# Altium PCB ControlBoard_v3.PcbDoc (part 1 of 3)
Units mm, origin at the board's own origin, x right, y up, seen from the top; angles counter-clockwise.
Board outline 113.28 x 137.67 mm, 2 copper layers (Top Layer, Bottom Layer); 118 components, 107 nets, 631 pads, 214 vias.
Unrouted connection lines stored in the file: 3.
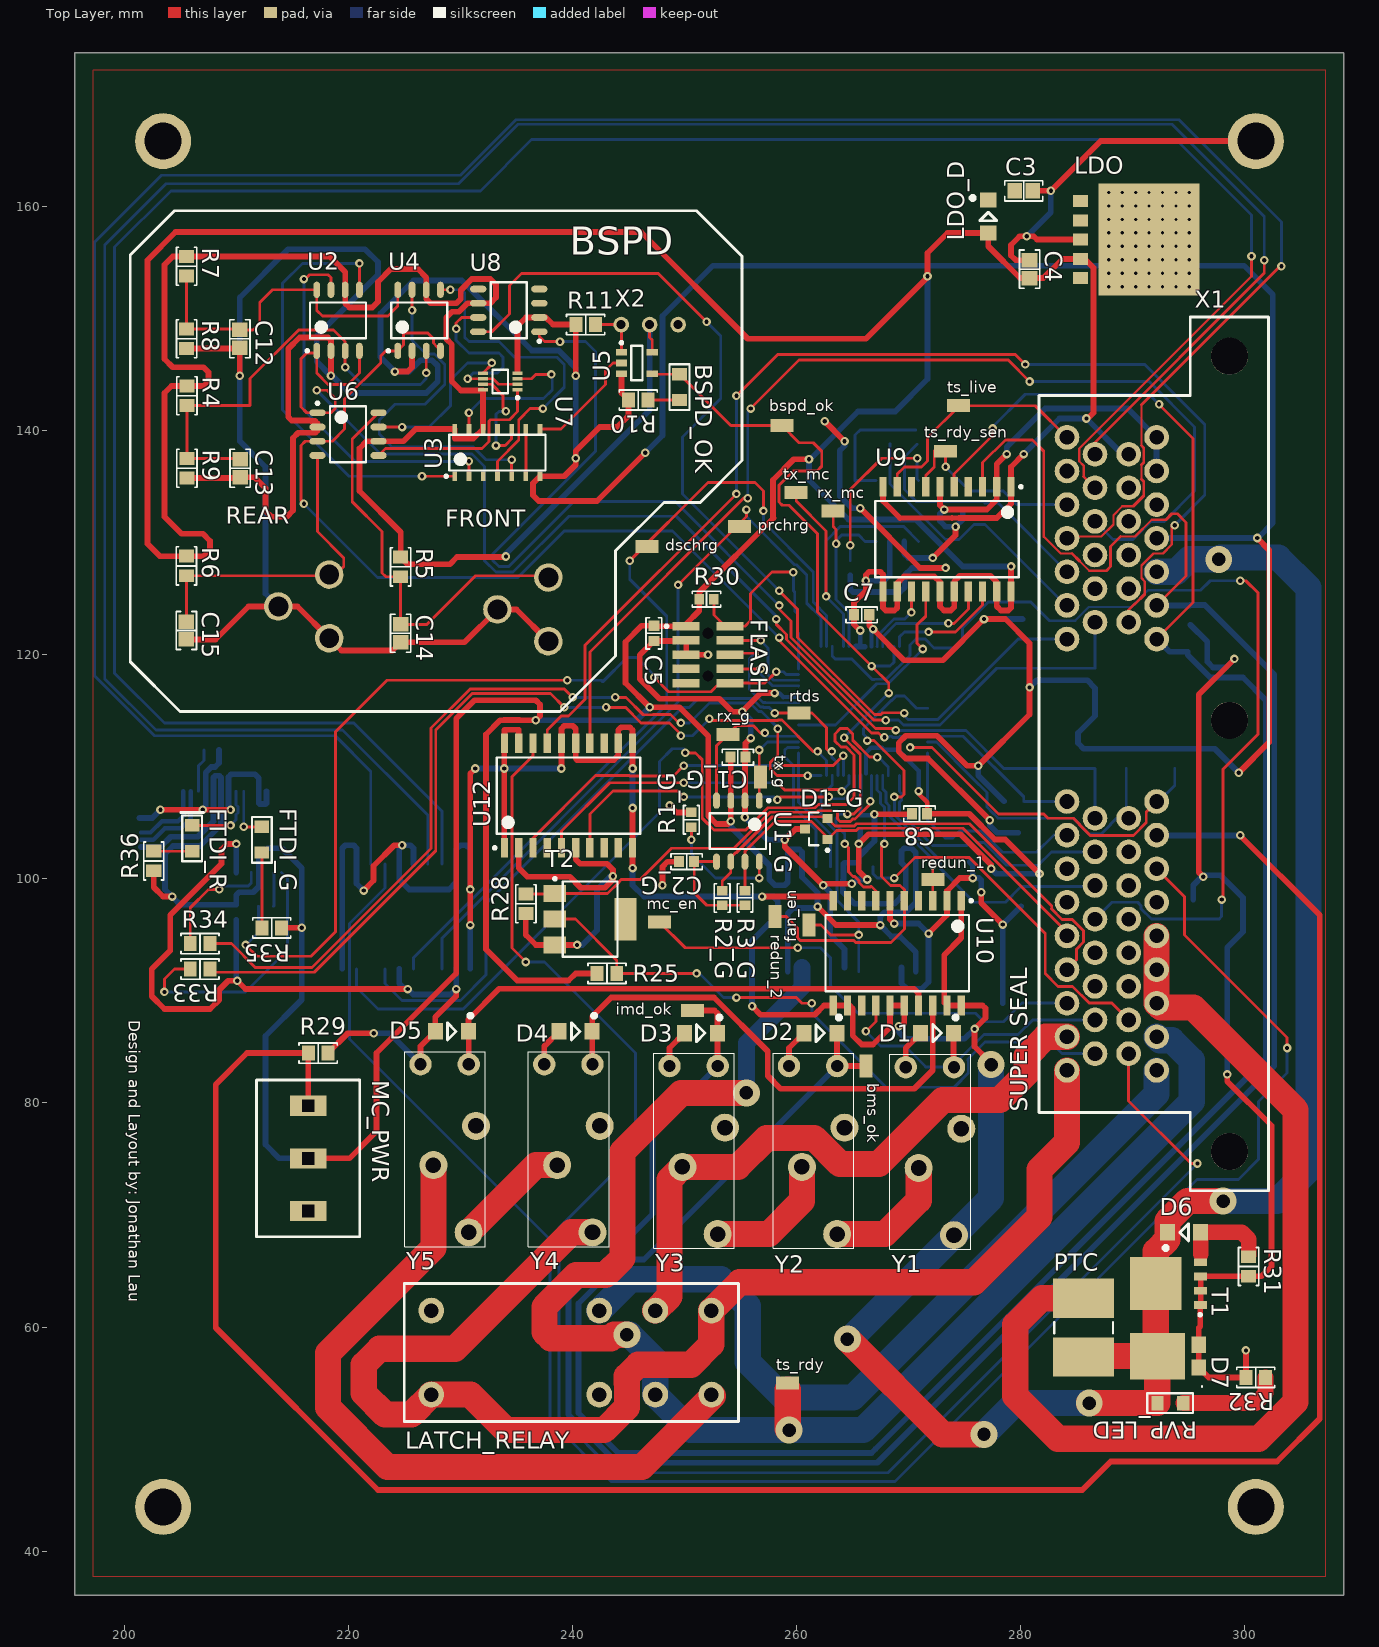
[diagram p0: Top Layer view]
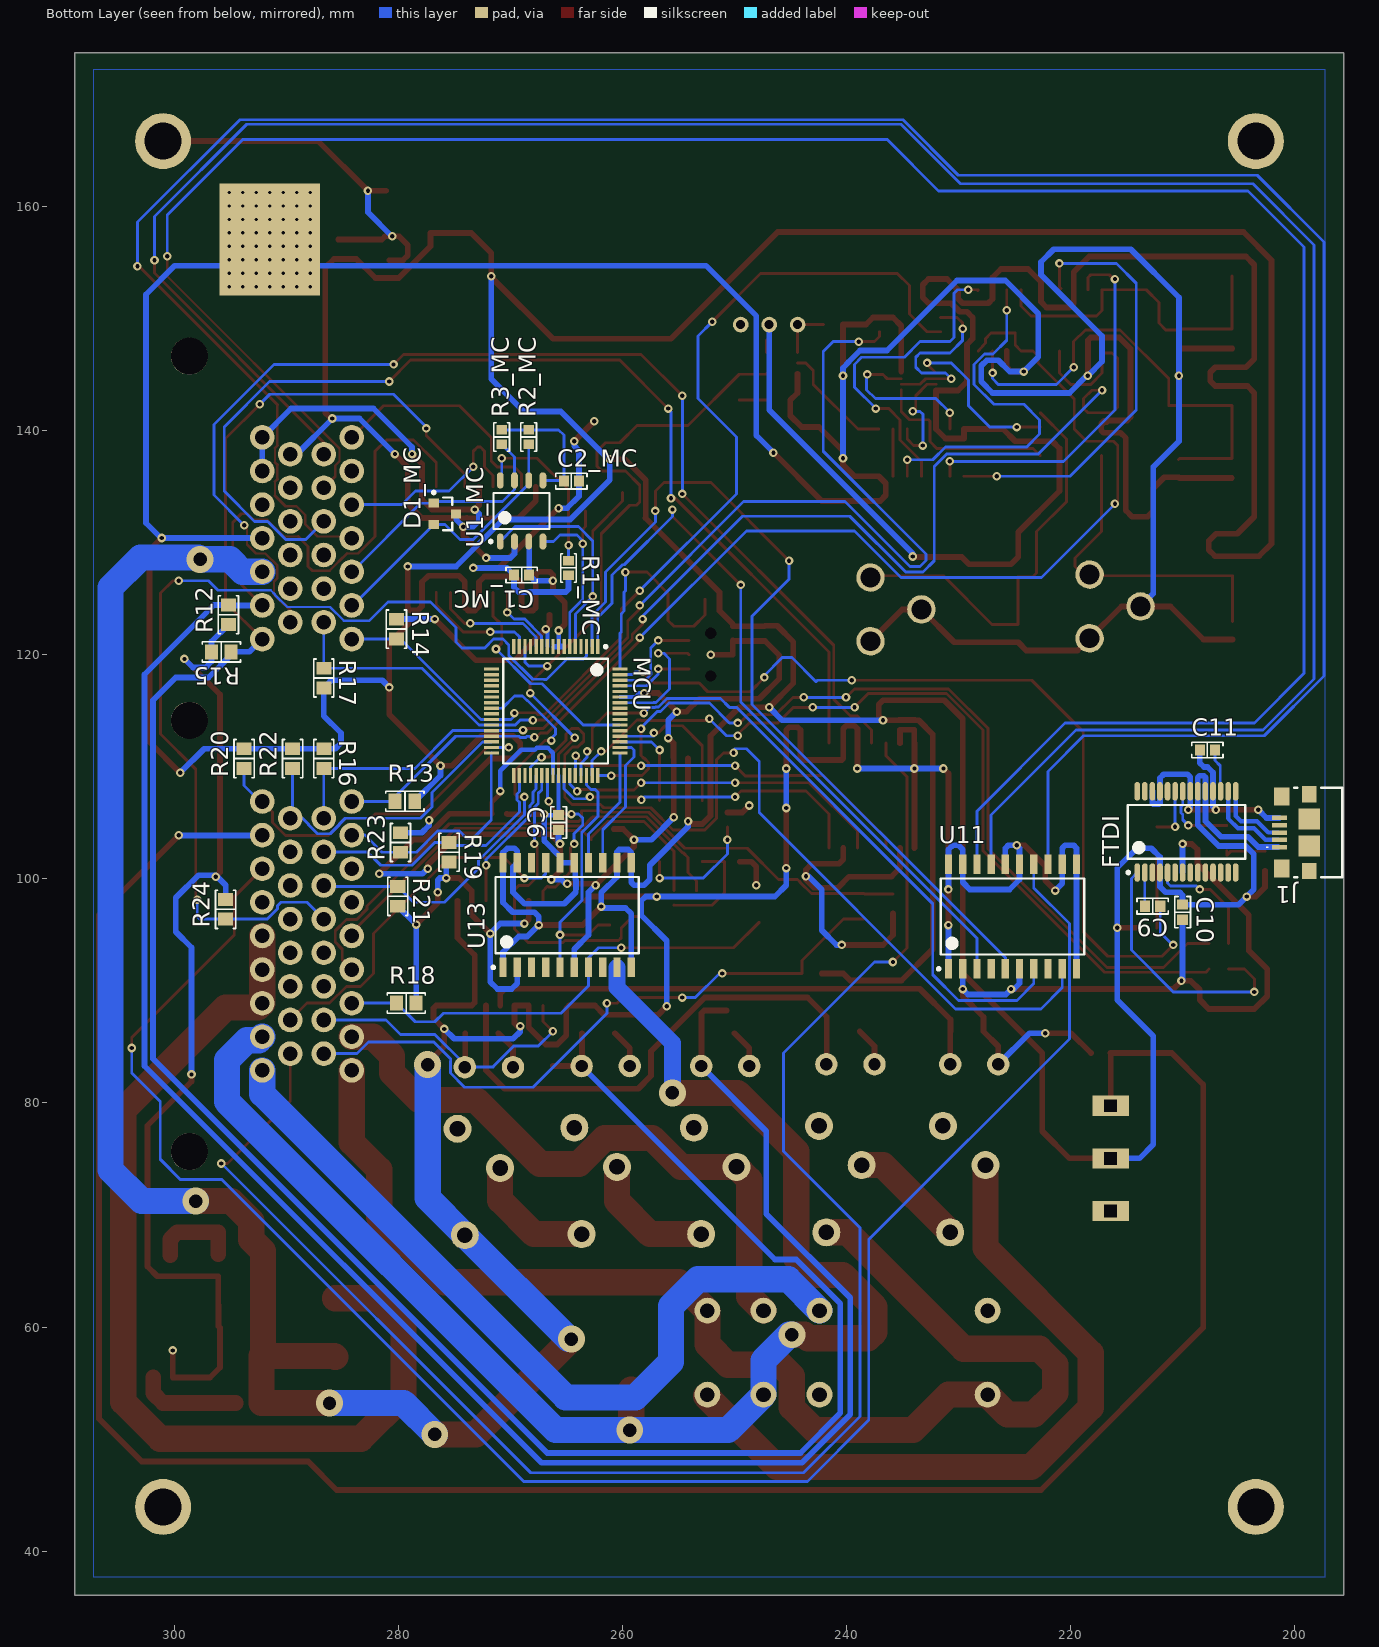
[diagram p1: Bottom Layer view, seen from below]
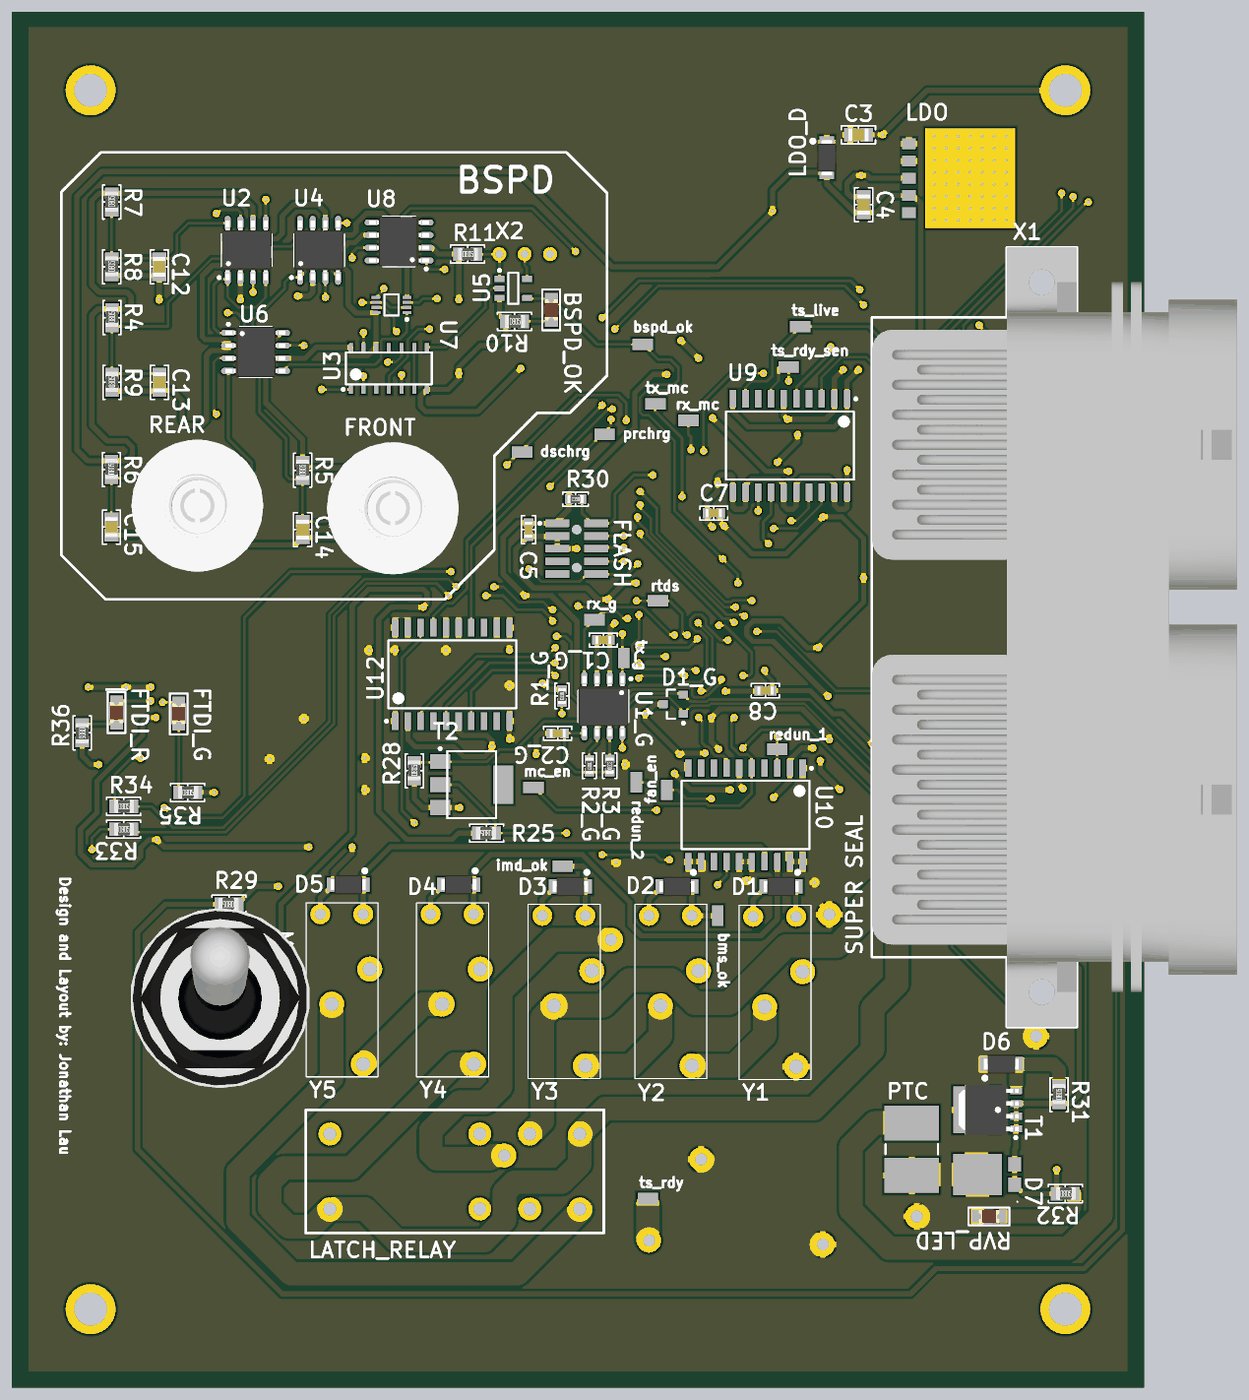
[diagram p3: 3D render of the assembled board from above, using the file's embedded part models]
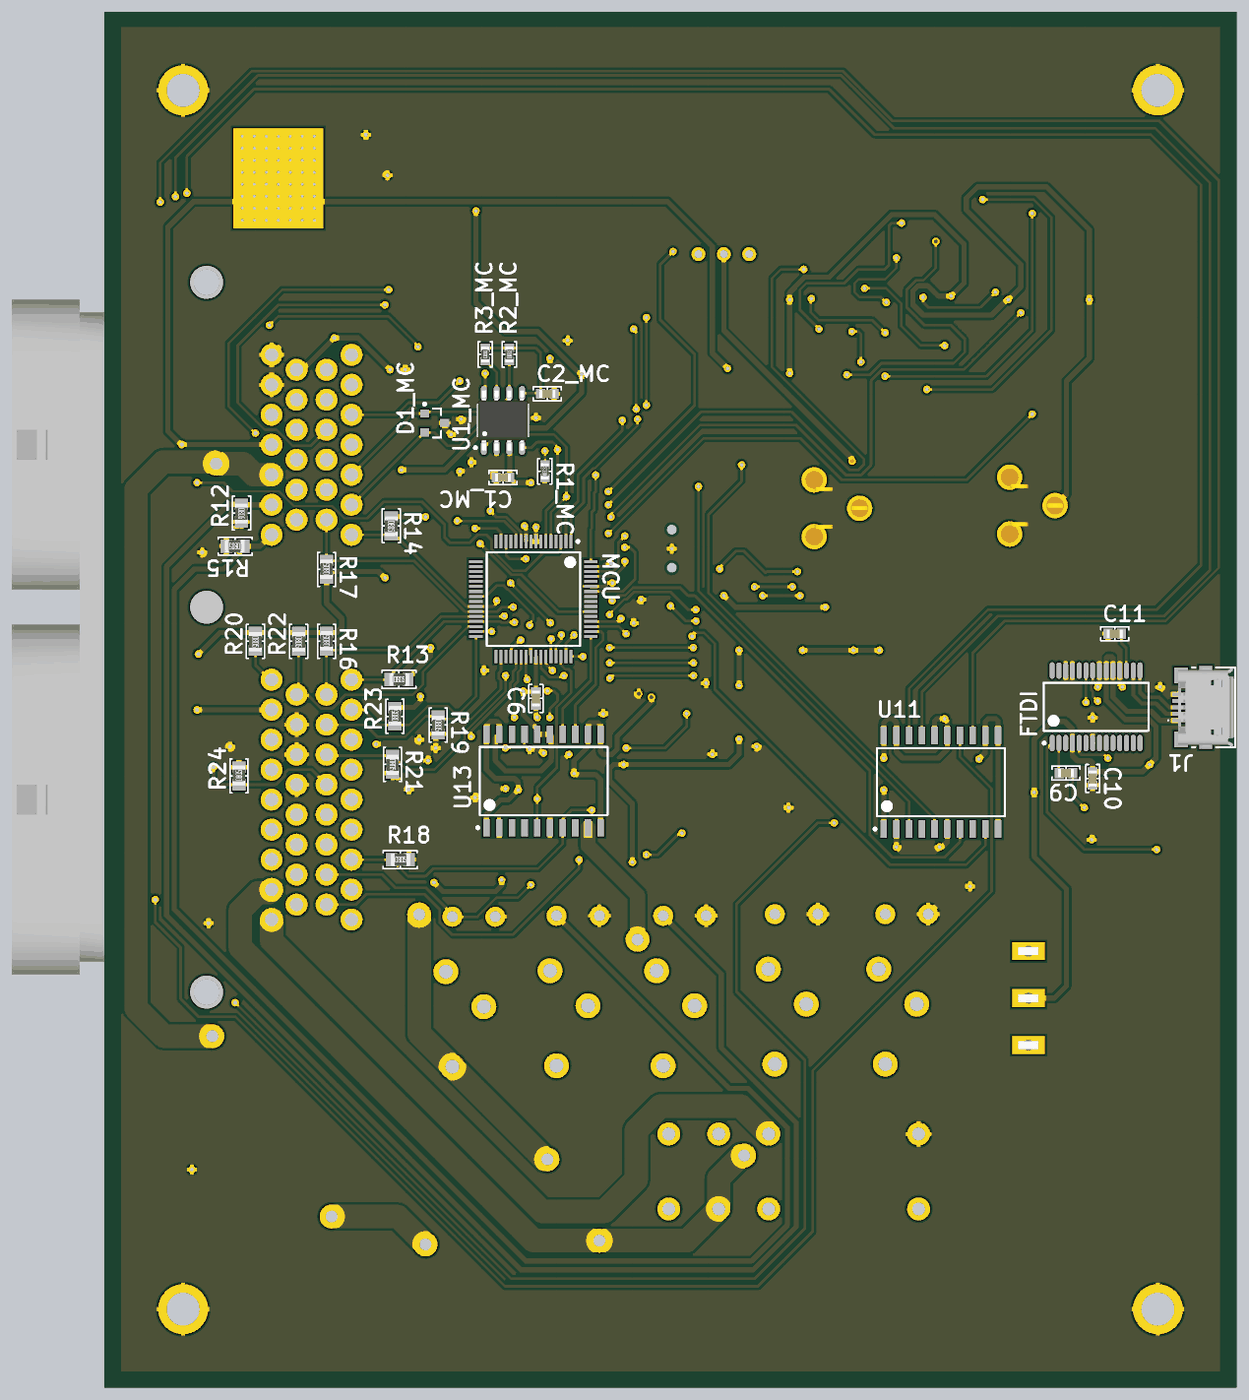
[diagram p4: 3D render of the assembled board from below, using the file's embedded part models]

## Layer stack, top to bottom
Top Solder: solder mask 0.0102, Solder Resist, Dk 3.5
Top Layer: signal copper 0.0356
Dielectric 1: dielectric 0.32, FR-4, Dk 4.8
Bottom Layer: signal copper 0.0356
Bottom Solder: solder mask 0.0102, Solder Resist, Dk 3.5

## Board outline
195.58,36.068 308.864,36.068 308.864,173.736 195.58,173.736

## Design rules (kind name [scope] priority, off if disabled: settings)
Clearance Clearance_3 [InNamedPolygon('GLV')] p1: gap=0.254 ignorepadtopadclearanceinfootprint=FALSE except(0: Arc-Hole Track-Hole SMDPad-Hole THPad-Hole Via-Hole Fill-Hole Poly-Hole Region-Hole Text-Hole)
Clearance Clearance_2 [InNamedPolygon('DGND')] p2: gap=0.254 ignorepadtopadclearanceinfootprint=FALSE except(0: Arc-Hole Track-Hole SMDPad-Hole THPad-Hole Via-Hole Fill-Hole Poly-Hole Region-Hole Text-Hole)
Clearance Clearance_1 [InNamedPolygon('GLV')] p3: gap=0.254 ignorepadtopadclearanceinfootprint=FALSE except(0: Arc-Hole Track-Hole SMDPad-Hole THPad-Hole Via-Hole Fill-Hole Poly-Hole Region-Hole Text-Hole)
Clearance [InNetClass('All Nets')] p4: gap=0.152 ignorepadtopadclearanceinfootprint=TRUE except(0.203: Poly-Hole)
DiffPairsRouting [All] p1: maxlimit=0.254 minlimit=0.254 mostfreqgap=0.254 toplayer_minwidth=0.381 toplayer_maxwidth=0.381 toplayer_prefwidth=0.381 bottomlayer_minwidth=0.381 bottomlayer_maxwidth=0.381 bottomlayer_prefwidth=0.381 maxuncoupledlength=12.7
FabricationTestPointUsage TestPointUsage [All] p1: valid=0 allowmultiple=FALSE
FabricationTestpoint Testpoint [All] p1: side=3 testpointundercomponent=TRUE minsize=1.016 maxsize=2.54 preferedsize=1.524 minholesize=0.508 maxholesize=1.016 preferedholesize=0.813 testpointgrid=0.025 allowsidetop=TRUE allowsidebottom=TRUE usegrid=TRUE gridtolerance=0
Height [All] p1: minheight=0 maxheight=50 prefheight=12.7
HoleSize [All] p1: absolutevalues=TRUE maxlimit=6.274 minlimit=0.254 maxpercent=80.000 minpercent=20.000
PasteMaskExpansion PasteMaskExpansion_1 [InComponent('P1')] p1: expansion=-3.81
PasteMaskExpansion [All] p2: expansion=0
PlaneClearance [All] p1: clearance=0.254
PlaneConnect [All] p1: planeconnectstyle=Relief reliefexpansion=0.381 reliefentries=4 reliefconductorwidth=0.254 reliefairgap=0.254
PolygonConnect PolygonConnect_4 [All vs IsNamedPolygon('GLV')] p1: connectstyle=Relief reliefconductorwidth=0.6 reliefentries=4 polygonreliefangle="90 Angle" airgapwidth=0.254
PolygonConnect PolygonConnect_3 [All vs IsNamedPolygon('GLV')] p2: connectstyle=Relief reliefconductorwidth=0.513 reliefentries=4 polygonreliefangle="90 Angle" airgapwidth=0.254
PolygonConnect PolygonConnect_2 [All vs IsNamedPolygon('GLV')] p3: connectstyle=Relief reliefconductorwidth=0.254 reliefentries=4 polygonreliefangle="90 Angle" airgapwidth=0.254
PolygonConnect PolygonConnect_1 [All vs IsNamedPolygon('DGND')] p4: connectstyle=Relief reliefconductorwidth=0.4 reliefentries=4 polygonreliefangle="90 Angle" airgapwidth=0.254
PolygonConnect [All] p5: connectstyle=Relief reliefconductorwidth=0.254 reliefentries=4 polygonreliefangle="90 Angle" airgapwidth=0.254
RoutingVias [All] p1: holewidth=0.381 width=0.762 viastyle="Through Hole" minholewidth=0.254 minwidth=0.508 maxholewidth=2 maxwidth=2.5
SilkToSolderMaskClearance SilkscreenOverComponentPads [IsPad] p1: minsilkscreentomaskgap=0.254 clearancetoexposedcopper=TRUE
SolderMaskExpansion [All] p1: expansion=0.127
UnRoutedNet [All] p1: checkbadconnections=TRUE
Width [All] p1: maxlimit=3.81 minlimit=0.203 preferedwidth=0.254 minimp=50.000000 maximp=50.000000 favimp=50.000000
20 further rules are at their usual default settings.

## Classes and differential pairs
channel class CAN_Tranceiver: GEN MC
component class USB: C9 C10 C11 FTDI FTDI_G FTDI_R J1 R33 R34 R35 R36
component class SHUTDOWN: D1 D2 D3 D4 D5 LATCH_RELAY Y1 Y2 Y3 Y4 Y5
component class RVP_OVP: D6 D7 PTC R31 R32 RVP_LED T1
component class MCU: C5 C6 C7 C8 FLASH MCU R30 rx_g rx_mc tx_g tx_mc
component class MC: C1_MC C2_MC D1_MC R1_MC R2_MC R3_MC U1_MC
component class MC_PWR_ENABLE: MC_PWR R29
component class LDO_5V: C3 C4 LDO LDO_D
component class GEN: C1_G C2_G D1_G R1_G R2_G R3_G U1_G
component class DRIVERS: bms_ok bspd_ok dschrg fan_en imd_ok mc_en prchrg R25 R28 redun_1 redun_2 rtds T2 ts_live ts_rdy ts_rdy_sen U9 U10 U11 U12 U13
component class CONNECTOR: R12 R13 R14 R15 R16 R17 R18 R19 R20 R21 R22 R23 R24 X1
component class BSPD: BSPD_OK C12 C13 C14 C15 FRONT R4 R5 R6 R7 R8 R9 R10 R11 REAR U2 U3 U4 U5 U7 U8 X2
differential pair D: +D_P -D_N

## Components (designator, comment, footprint, x,y, rotation, side; value= is the part's Value field where it differs from the comment)
bms_ok "bms_ok" RCU-0C 266.192,83.319 r0 top (schematic designator TEST5)
bspd_ok "bspd_ok" RCU-0C 258.699,140.462 r90 top (schematic designator TEST10)
BSPD_OK "LED" 0805_LED 249.555,143.891 r270 top value=Green
C1_G "Capacitor MLCC 0.10uf 50V CAP 0603/1608" "CAP 0603/1608" 254.762,110.871 r180 top value=0.10uf (schematic designator C1)
C1_MC "Capacitor MLCC 0.10uf 50V CAP 0603/1608" "CAP 0603/1608" 268.986,127.127 r180 bottom value=0.10uf (schematic designator C1)
C2_G "Capacitor MLCC 4700pf 50V CAP 0603/1608" "CAP 0603/1608" 250.19,101.542 r0 top value=4700pf (schematic designator C2)
C2_MC "Capacitor MLCC 4700pf 50V CAP 0603/1608" "CAP 0603/1608" 264.541,135.509 r0 bottom value=4700pf (schematic designator C2)
C3 "Capacitor MLCC 0.22uf 50V CAP 0805/2012" "CAP 0805/2012" 280.289,161.417 r180 top value=0.22uf
C4 "Capacitor MLCC 0.10uf 50V CAP 0805/2012" "CAP 0805/2012" 280.797,154.432 r270 top value=0.10uf
C5 "Capacitor MLCC 0.10uf 16V CAP 0603/1608" "CAP 0603/1608" 247.269,121.92 r90 top value=0.10uf
C6 "Capacitor MLCC 0.10uf 25V CAP 0603/1608" "CAP 0603/1608" 265.684,105.029 r90 bottom value=0.10uf
C7 "Capacitor MLCC 0.10uf 25V CAP 0603/1608" "CAP 0603/1608" 265.811,123.571 r180 top value=0.10uf
C8 "Capacitor MLCC 100pf 25V CAP 0603/1608" "CAP 0603/1608" 270.978,105.812 r180 top value=100pf
C9 "Capacitor MLCC 0.10uf 25V CAP 0603/1608" "CAP 0603/1608" 212.653,97.566 r180 bottom value=0.10uf
C10 "Capacitor MLCC 0.10uf 25V CAP 0603/1608" "CAP 0603/1608" 209.986,97.028 r90 bottom value=0.10uf
C11 "Capacitor MLCC 0.10uf 25V CAP 0603/1608" "CAP 0603/1608" 207.772,111.506 r180 bottom value=0.10uf
C12 "Capacitor MLCC 0.10uf 16V CAP 0805/2012" "CAP 0805/2012" 210.312,148.209 r90 top value=0.10uf
C13 "Capacitor MLCC 0.10uf 16V CAP 0805/2012" "CAP 0805/2012" 210.337,136.652 r90 top value=0.10uf
C14 "Capacitor MLCC 0.10uf 16V CAP 0805/2012" "CAP 0805/2012" 224.663,121.92 r90 top value=0.10uf
C15 "Capacitor MLCC 0.10uf 16V CAP 0805/2012" "CAP 0805/2012" 205.537,122.174 r90 top value=0.10uf
D1 "DIODE" SOD123F 272.542,86.233 r0 top
D1_G "NUP1105LT1G" "SOT-23 (TO-236)" 261.763,104.46 r180 top value=TVS_24V (schematic designator D1)
D1_MC "NUP1105LT1G" "SOT-23 (TO-236)" 275.828,132.588 r180 bottom value=TVS_24V (schematic designator D1)
D2 "DIODE" SOD123F 262.128,86.233 r0 top
D3 "DIODE" SOD123F 251.46,86.233 r0 top
D4 "DIODE" SOD123F 240.284,86.393 r0 top
D5 "DIODE" SOD123F 229.235,86.393 r0 top
D6 "DDZ9701-7" SOD123F 294.591,68.453 r180 top value=14Vz
D7 "DIODE_2A1K" TO-277 293.116,57.404 r180 top value="20 A"
dschrg "dschrg" RCU-0C 246.634,129.667 r90 top (schematic designator TEST15)
fan_en "fan_en" RCU-0C 261.112,95.885 r180 top (schematic designator TEST3)
FLASH "CN-2P-M-R10" HDR2X5_SMT 252.095,120.015 r270 top value=CONN
FRONT "RV6LAYSA502A" RV6LAYSA502A 234.975,124.057 r90 top value="100-5M Ohms" (schematic designator BRAKE_FRONT_POT)
FTDI "FT232RL" SSOP-28 209.64,104.196 r90 bottom
FTDI_G "LED" 0805_LED 212.272,103.505 r90 top value=Green (schematic designator GRN)
FTDI_R "LED" 0805_LED 206.049,103.632 r90 top value=Red (schematic designator RED)
imd_ok "imd_ok" RCU-0C 250.698,88.265 r90 top (schematic designator TEST2)
J1 "USB-5-6SHLD" TECO-1981568-5_V 201.35,104.14 r90 bottom value=CONN
LATCH_RELAY "JW2SN-DC12V-Relay" JW2SN-DC12V-Relay 239.95,57.718 r180 top
LDO "BA50DD0WHFP-TR" HRP5 291.465,157.064 r270 top value=5V
LDO_D "DIODE" SOD123F 277.114,159.131 r90 top
mc_en "mc_en" RCU-0C 247.777,96.139 r90 top (schematic designator TEST22)
MC_PWR "SPST" M2011SS1W01/UC 216.408,75.057 r180 top (schematic designator MC_PWR_SWITCH)
MCU "MKE18F512 VLH16 MCU" TQFP64 265.938,114.984 r270 bottom
prchrg "prchrg" RCU-0C 254.889,131.445 r90 top (schematic designator TEST14)
PTC "PTC Fuse" "PTC Fuse 2920/07351" 285.623,59.944 r270 top value="2A hold, 4A trip, 40A max" (schematic designator "PTC Fuse")
R1_G "Resistor 100 0603 1/10W 10%" "RES 0603/1608" 250.615,105.283 r270 top value=100 (schematic designator R1)
R1_MC "Resistor 100 0603 1/10W 10%" "RES 0603/1608" 264.795,127.762 r90 bottom value=100 (schematic designator R1)
R2_G "Resistor 62 0603 1/10W 5%" "RES 0603/1608" 253.365,98.298 r270 top value=62 (schematic designator R2)
R2_MC "Resistor 62 0603 1/10W 5%" "RES 0603/1608" 268.351,139.446 r90 bottom value=62 (schematic designator R2)
R3_G "Resistor 62 0603 1/10W 5%" "RES 0603/1608" 255.397,98.313 r90 top value=62 (schematic designator R3)
R3_MC "Resistor 62 0603 1/10W 5%" "RES 0603/1608" 270.764,139.446 r270 bottom value=62 (schematic designator R3)
R4 "Resistor 2.0k 0805 1/4W 5%" "RES 0805/2012" 205.588,143.129 r90 top value=2.0k
R5 "Resistor 3.0k 0805 1/2W 5%" "RES 0805/2012" 224.663,127.851 r90 top value=3.0k
R6 "Resistor 3.0k 0805 1/2W 5%" "RES 0805/2012" 205.537,127.937 r90 top value=3.0k
R7 "Resistor 18k 0805 1/4W 5%" "RES 0805/2012" 205.562,154.686 r90 top value=18k
R8 "Resistor 2.0k 0805 1/4W 5%" "RES 0805/2012" 205.562,148.209 r90 top value=2.0k
R9 "Resistor 18k 0805 1/4W 5%" "RES 0805/2012" 205.588,136.652 r90 top value=18k
R10 "Resistor 240 0805 1/4W 1%" "RES 0805/2012" 245.872,142.748 r0 top value=240
R11 "Resistor 47k 0805 1/4W 1%" "RES 0805/2012" 241.173,149.479 r0 top value=47k
R12 "Resistor 47k 0805 1/10W 1%" "RES 0805/2012" 295.148,123.571 r270 bottom value=47k
R13 "Resistor 47k 0805 1/10W 5%" "RES 0805/2012" 279.4,106.934 r180 bottom value=47k
R14 "Resistor 47k 0805 1/10W 5%" "RES 0805/2012" 280.162,122.301 r270 bottom value=47k
R15 "Resistor 47k 0805 1/10W 1%" "RES 0805/2012" 295.783,120.269 r0 bottom value=47k
R16 "Resistor 47k 0805 1/10W 5%" "RES 0805/2012" 286.639,110.744 r90 bottom value=47k
R17 "Resistor 47k 0805 1/10W 5%" "RES 0805/2012" 286.639,117.931 r90 bottom value=47k
R18 "Resistor 47k 0805 1/10W 1%" "RES 0805/2012" 279.273,88.91 r180 bottom value=47k
R19 "Resistor 47k 0805 1/10W 5%" "RES 0805/2012" 275.463,102.376 r270 bottom value=47k
R20 "Resistor 47k 0805 1/10W 5%" "RES 0805/2012" 293.751,110.744 r270 bottom value=47k
R21 "Resistor 47k 0805 1/10W 5%" "RES 0805/2012" 280.035,98.439 r270 bottom value=47k
R22 "Resistor 47k 0805 1/10W 5%" "RES 0805/2012" 289.433,110.744 r270 bottom value=47k
R23 "Resistor 47k 0805 1/10W 5%" "RES 0805/2012" 279.795,103.251 r90 bottom value=47k
R24 "Resistor 47k 0805 1/10W 5%" "RES 0805/2012" 295.402,97.282 r90 bottom value=47k
R25 "Resistor 47k 0805 1/4W 5%" "RES 0805/2012" 243.078,91.567 r180 top value=47k
R28 "Resistor 47k 0805 1/4W 5%" "RES 0805/2012" 235.839,97.79 r90 top value=47k
R29 "Resistor 47k 0805 1/4W 10%" "RES 0805/2012" 217.297,84.455 r180 top value=47k
R30 "Resistor 10k 0603 1/10W 1%" "RES 0603/1608" 251.968,124.968 r180 top value=10k
R31 "Resistor 47k 0805 1/10W 1%" "RES 0805/2012" 300.355,65.405 r90 top value=47k
R32 "Resistor 470 0805 1/10W 1%" "RES 0805/2012" 300.99,55.499 r0 top value=470
R33 "Resistor 1.0k 0805 1/4W 1%" "RES 0805/2012" 206.756,91.948 r0 top value=1.0k
R34 "Resistor 1.0k 0805 1/4W 1%" "RES 0805/2012" 206.756,94.234 r0 top value=1.0k
R35 "Resistor 1.0k 0805 1/4W 1%" "RES 0805/2012" 213.161,95.631 r0 top value=1.0k
R36 "Resistor 1.0k 0805 1/4W 1%" "RES 0805/2012" 202.62,101.6 r270 top value=1.0k
REAR "RV6LAYSA502A" RV6LAYSA502A 215.417,124.322 r90 top value="100-5M Ohms" (schematic designator BRAKE_REAR_POT)
redun_1 "redun_1" RCU-0C 272.161,99.949 r90 top (schematic designator TEST8)
redun_2 "redun_2" RCU-0C 258.064,96.647 r0 top (schematic designator TEST9)
rtds "rtds" RCU-0C 260.223,114.808 r90 top (schematic designator TEST16)
RVP_LED "LED" 0805_LED 293.363,53.213 r0 top value=Green
rx_g "can_rx_gen" RCU-0C 253.873,112.903 r90 top (schematic designator TEST19)
rx_mc "can_rx_mc" RCU-0C 263.271,132.842 r90 top (schematic designator TEST21)
T1 "PSMN2R2-25YLC 25V Logic Level MOSFET" LFPAK-SO8 293.37,63.881 r180 top value=N_Channel
T2 "STN1HNK60" SOT-223-3 241.579,96.41 r0 top
ts_live "ts_live" RCU-0C 274.447,142.24 r90 top (schematic designator TEST4)
ts_rdy "ts_rdy" RCU-0C 259.207,54.991 r90 top (schematic designator TEST7)
ts_rdy_sen "ts_rdy_sen" RCU-0C 273.304,138.176 r90 top (schematic designator TEST6)
tx_g "can_tx_gen" RCU-0C 256.794,109.093 r180 top (schematic designator TEST18)
tx_mc "can_tx_mc" RCU-0C 259.969,134.493 r90 top (schematic designator TEST20)
U1_G "MCP2561 CAN Transceiver" SOIC-8 254.762,104.267 r270 top value=CAN/UART (schematic designator U1)
U1_MC "MCP2561 CAN Transceiver" SOIC-8 268.986,132.842 r90 bottom value=CAN/UART (schematic designator U1)
U2 "BF_RANGE" SOIC-8 219.075,149.86 r90 top
U3 "AND" SOT108-1 233.299,138.049 r90 top
U4 "BR_RANGE" SOIC-8 226.314,149.86 r90 top
U5 "OR_BYPASS" SOT23-5 245.745,146.05 r0 top
U6 "BF_BR" SOIC-8 219.964,139.7 r0 top
U7 "NAND" R-PDSO-G8 233.553,144.399 r180 top
U8 "C_CA" SOIC-8 234.315,150.749 r180 top
U9 "5V_OUT" PG-DSO-20 273.431,130.326 r270 top
U10 "12V_OUT_1" PG-DSO-20 268.986,93.379 r270 top
U11 "12V_OUT_2" PG-DSO-20 225.171,96.647 r90 bottom
U12 "PG-DSO-20" PG-DSO-20 239.649,107.442 r90 top
U13 "PG-DSO-20" PG-DSO-20 264.922,96.774 r90 bottom
X1 "GENERAL" "SUPERSEAL 60POS 90Deg" 298.639,75.66 r90 top value=CONN
X2 "TEST" XG8V-0331 249.428,149.479 r180 top
Y1 "ACTP112" ACTP112 274.052,68.199 r90 top
Y2 "ACTP112" ACTP112 263.627,68.295 r90 top
Y3 "ACTP112" ACTP112 252.959,68.295 r90 top
Y4 "ACTP112" ACTP112 241.783,68.455 r90 top
Y5 "ACTP112" ACTP112 230.734,68.455 r90 top

## Footprints (in the part's own frame and the unit in brackets; to place one, negate y for a bottom-side part, rotate by r counter-clockwise, add the part's x,y. Pads: shape width x height; smd on the part's side, far side on the other; paste and mask are expansions set on the pad)
0805_LED [mm]
  rect 1.1x1.3 smd: 1(-1.15,0) 2(1.15,0)
  silkscreen extent -2.06,-0.89 2.03,0.89, body extent -1.05,-0.67 1.05,0.68, height 0.9
ACTP112 [mm] "ACTP112, 12V Relay"
  round 2 hole 1.1: COIL1(15,0) COIL2(15,4.3)
  round 2.5 hole 1.4: COM(0,0) NC(9.5,-0.65) NO(6,3.15)
  silkscreen extent -1.27,-1.49 16.13,5.72, body extent -1.27,-1.52 16.13,5.72, height 13.5
"CAP 0603/1608" [mm] "Chip Capacitor, 2-Leads, Body 1.60x0.80mm, IPC Medium Density"
  rect 0.9x1 smd: 1(-0.675,0) 2(0.675,0)
  silkscreen extent -1.4,-0.7 1.4,0.7, body extent -0.8,-0.41 0.8,0.41, height 0.82
"CAP 0805/2012" [mm] "Chip Capacitor, 2-Leads, Body 2.00x1.20mm, IPC Medium Density"
  rect 1.3x1.4 smd: 1(-0.8,0) 2(0.8,0)
  silkscreen extent -1.7,-0.9 1.7,0.9, body extent -1,-0.64 1,0.64, height 1.26
HDR2X5_SMT [mm] "Header, 10-Leads, Body 3.43x6.35mm, Pitch 1.27mm"
  rect 0.76x2.4 smd: 1(-2.54,-1.95) 2(-2.54,1.95) 3(-1.27,-1.95) 4(-1.27,1.95) 5(0,-1.95) 6(0,1.95) 7(1.27,-1.95) 8(1.27,1.95) 9(2.54,-1.95) 10(2.54,1.95)
  round 0 hole 1 unplated: MH1(-1.905,0) MH2(1.905,0)
  silkscreen extent -2.66,-3.82 -2.42,-3.57, body extent -3.18,-1.72 3.18,1.72, height 4.55
HRP5 [mm]
  rect 1.07x1.37 smd: 1(-3.44,-6.125) 2(-1.72,-6.125) 3(0,-6.125) 4(1.72,-6.125) 5(3.44,-6.125)
  rect 10x9 all layers, no hole: 6(0,0)
  round 0 hole 0.3: hole(-4.2,2.4) hole(-4.2,3.6) hole(-4.2,-1.2) hole(-4.2,0) hole(-4.2,1.2) hole(-4.2,-3.6) hole(-4.2,-2.4) hole(-3,3.6) hole(-3,1.2) hole(-3,2.4) hole(-3,0) hole(-3,-2.4) hole(-3,-1.2) hole(-3,-3.6) hole(-1.8,3.6) hole(-1.8,1.2) hole(-1.8,2.4) hole(-1.8,0) hole(-1.8,-2.4) hole(-1.8,-1.2) hole(-1.8,-3.6) hole(-0.6,3.6) hole(-0.6,2.4) hole(-0.6,1.2) hole(-0.6,0) hole(-0.6,-1.2) hole(-0.6,-2.4) hole(-0.6,-3.6) hole(0.6,3.6) hole(0.6,2.4) hole(0.6,1.2) hole(0.6,0) hole(0.6,-1.2) hole(0.6,-2.4) hole(0.6,-3.6) hole(1.8,3.6) hole(1.8,1.2) hole(1.8,2.4) hole(1.8,0) hole(1.8,-2.4) hole(1.8,-1.2) hole(1.8,-3.6) hole(3,3.6) hole(3,1.2) hole(3,2.4) hole(3,0) hole(3,-2.4) hole(3,-1.2) hole(3,-3.6) hole(4.2,2.4) hole(4.2,3.6) hole(4.2,-1.2) hole(4.2,0) hole(4.2,1.2) hole(4.2,-3.6) hole(4.2,-2.4)
  body extent -4.75,-4.44 4.7,4.45, height 1.9
JW2SN-DC12V-Relay [mm] "JW2SN-DC12V"
  round 2.3 hole 1.3: 1(12.554,-3.75) 2(-2.446,-3.75) 3(-7.446,-3.75) 4(-12.446,-3.75) 5(-12.446,3.75) 6(-7.446,3.75) 7(-2.446,3.75) 8(12.554,3.75)
  silkscreen extent -14.86,-6.16 14.97,6.16, body extent -14.73,-6.1 14.86,6.1, height 20
LFPAK-SO8 [mm] "TO, 5-Pads, Body 5.15x5.86mm (max), IPC Low Density"
  rect 1.15x0.7 smd: 1(-2.7,1.905) 2(-2.7,0.635) 3(-2.7,-0.635) 4(-2.7,-1.905)
  rect 4.6x4.7 smd: mb(1.3,0)
  silkscreen extent -2.78,2.66 -2.53,2.9, body extent -2.95,-2.5 3.05,2.5, height 1.25
M2011SS1W01/UC [mm]
  rect 3.25x1.8 hole 1.1 square: 1(0,-4.7) 2(0,0) 3(0,4.7)
  Top Layer keep-out lines w0.254: -4.5,-7 -4.5,-7
  silkscreen extent -4.6,-7 4.6,7, body extent -9,-9 9,9, height 38.44
PG-DSO-20 [mm] "PG-DSO-20, 20-Leads, Body 12.70x7.50mm, Pitch 1.27mm, IPC Medium Density, BTS716G"
  rect 1.75x0.65 smd: 1(-4.675,5.715) 2(-4.675,4.445) 3(-4.675,3.175) 4(-4.675,1.905) 5(-4.675,0.635) 6(-4.675,-0.635) 7(-4.675,-1.905) 8(-4.675,-3.175) 9(-4.675,-4.445) 10(-4.675,-5.715) 11(4.675,-5.715) 12(4.675,-4.445) 13(4.675,-3.175) 14(4.675,-1.905) 15(4.675,-0.635) 16(4.675,0.635) 17(4.675,1.905) 18(4.675,3.175) 19(4.675,4.445) 20(4.675,5.715)
  silkscreen extent -4.8,-6.4 3.4,6.72, body extent -3.8,-6.4 3.8,6.4, height 2.65
"PTC Fuse 2920/07351" [mm] "Chip PTC Fuse, 2-Leads, Body 7.36x5.12mm, IPC Medium Density"
  rect 3.5x5.45 smd: 1(-2.625,0) 2(2.625,0)
  silkscreen extent -0.5,-2.62 0.5,2.63, body extent -3.99,-2.72 3.99,2.72, height 1.25
R-PDSO-G8 [mm] "TSSOP, 8-Leads, Body 2.00x2.30mm, Pitch 0.50mm, IPC Medium Density SN74LVC2G132"
  rect 0.9x0.3 smd: 1(-1.55,0.75) 2(-1.55,0.25) 3(-1.55,-0.25) 4(-1.55,-0.75) 5(1.55,-0.75) 6(1.55,-0.25) 7(1.55,0.25) 8(1.55,0.75)
  silkscreen extent -1.68,-1.05 0.7,1.57, body extent -1.1,-1.05 1.1,1.05, height 0.9
RCU-0C [mm]
  rect 1.15x2.05 smd: 1(0,0)
"RES 0603/1608" [mm] "Chip Resistor, 2-Leads, Body 1.60x0.80mm, IPC Medium Density"
  rect 0.85x0.95 smd: 1(-0.65,0) 2(0.65,0)
  silkscreen extent -1.27,-0.7 1.27,0.7, body extent -0.8,-0.4 0.8,0.4, height 0.45
"RES 0805/2012" [mm] "Chip Resistor, 2-Leads, Body 2.00x1.25mm, IPC Medium Density"
  rect 1.15x1.35 smd: 1(-0.875,0) 2(0.875,0)
  silkscreen extent -1.7,-0.9 1.7,0.9, body extent -0.95,-0.62 1.05,0.63, height 0.6
RV6LAYSA502A [mil] "5k Potentiometer"
  round 100 hole 70: 1(111.81,-112.94) 2(0,66) 3(-111.81,-112.94)
  body extent -260,-210 260,310, height 1361
SOD123F [mm] "SODFL, 2-Leads, Body 1.80x3.50mm, IPC Low Density"
  rect 1.35x1.45 smd: 1(-1.475,0) 2(1.475,0)
  silkscreen extent -0.38,-0.76 1.75,1.5, body extent -1.75,-0.95 1.75,0.95, height 1.15
SOIC-8 [mm] "SOIC, 8-Leads, Body 4.90x3.90mm, Pitch 1.27mm, IPC Medium Density"
  oval 1.45x0.6 smd: 1(-2.725,1.905) 2(-2.725,0.635) 3(-2.725,-0.635) 4(-2.725,-1.905) 5(2.725,-1.905) 6(2.725,-0.635) 7(2.725,0.635) 8(2.725,1.905)
  silkscreen extent -2.85,-2.5 1.6,2.88, body extent -3,-2.5 3,2.5, height 1.75
SOT23-5 [mm] "SOT23, 5-Leads, Body 2.90x2.80mm, Pitch 0.95mm, IPC Medium Density, LP5907-3.3"
  rect 1x0.6 smd: 1(-1.375,0.95) 2(-1.375,0) 3(-1.375,-0.95) 4(1.375,-0.95) 5(1.375,0.95)
  silkscreen extent -1.5,-1.55 0.5,1.92, body extent -0.88,-1.52 0.87,1.53, height 1.45
SOT108-1 [mm] "SOP, 14-Leads, Body 8.65x3.90mm, Pitch 1.27mm, IPC Medium Density, 74HC21"
  rect 0.889x0.42 smd: 1(-2.105,3.81) 2(-2.105,2.54) 3(-2.105,1.27) 4(-2.105,0) 5(-2.105,-1.27) 6(-2.105,-2.54) 7(-2.105,-3.81) 8(2.105,-3.81) 9(2.105,-2.54) 10(2.105,-1.27) 11(2.105,0) 12(2.105,1.27) 13(2.105,2.54) 14(2.105,3.81)
  silkscreen extent -2.23,-4.3 1.6,4.69, body extent -2,-4.3 2,4.3, height 1.75
"SOT-23 (TO-236)" [mm]
  rect 0.9x0.8 smd: 1(-1,0.95) 2(-1,-0.95) 3(1,0)
  silkscreen extent -1.13,-1.46 0.65,2.02, body extent -0.65,-1.46 0.65,1.46, height 1.11
SOT-223-3 [mm] "SOT223127P600-8N, NCP1117STAT3G, MMBT4403-7-F"
  rect 2x1.5 smd: 1(-3.15,2.3) 2(-3.15,0) 3(-3.15,-2.3)
  rect 2x3.8 smd: THM(3.15,0)
  silkscreen extent -3.27,-3.35 2.45,3.72, body extent -1.85,-3.35 1.85,3.35, height 1.8
SSOP-28 [mm] "SOP68P780X200-28N ,SOP, 28-Leads, Body 10.20x5.30mm, Pitch 0.68mm, IPC Medium Density, FT232RL"
  oval 1.65x0.5 smd: 1(-3.625,4.394) 2(-3.625,3.718) 3(-3.625,3.042) 4(-3.625,2.366) 5(-3.625,1.69) 6(-3.625,1.014) 7(-3.625,0.338) 8(-3.625,-0.338) 9(-3.625,-1.014) 10(-3.625,-1.69) 11(-3.625,-2.366) 12(-3.625,-3.042) 13(-3.625,-3.718) 14(-3.625,-4.394) 15(3.625,-4.394) 16(3.625,-3.718) 17(3.625,-3.042) 18(3.625,-2.366) 19(3.625,-1.69) 20(3.625,-1.014) 21(3.625,-0.338) 22(3.625,0.338) 23(3.625,1.014) 24(3.625,1.69) 25(3.625,2.366) 26(3.625,3.042) 27(3.625,3.718) 28(3.625,4.394)
  silkscreen extent -3.75,-5.25 2.4,5.32, body extent -2.8,-5.25 2.8,5.25, height 2
"SUPERSEAL 60POS 90Deg" [mm]
  round 2.2 hole 1.3: A1(7.25,14.5) A2(10.25,14.5) A3(13.25,14.5) A4(16.25,14.5) A5(19.25,14.5) A6(22.25,14.5) A7(25.25,14.5) A8(28.25,14.5) A9(31.25,14.5) A10(8.75,12) A11(11.75,12) A12(14.75,12) A13(17.75,12) A14(20.75,12) A15(23.75,12) A16(26.75,12) A17(29.75,12) A18(8.75,9) A19(11.75,9) A20(14.75,9) A21(17.75,9) A22(20.75,9) A23(23.75,9) A24(26.75,9) A25(29.75,9) A26(7.25,6.5) A27(10.25,6.5) A28(13.25,6.5) A29(16.25,6.5) A30(19.25,6.5) A31(22.25,6.5) A32(25.25,6.5) A33(28.25,6.5) A34(31.25,6.5) B1(45.75,14.5) B2(48.75,14.5) B3(51.75,14.5) B4(54.75,14.5) B5(57.75,14.5) B6(60.75,14.5) B7(63.75,14.5) B8(47.25,12) B9(50.25,12) B10(53.25,12) B11(56.25,12) B12(59.25,12) B13(62.25,12) B14(47.25,9) B15(50.25,9) B16(53.25,9) B17(56.25,9) B18(59.25,9) B19(62.25,9) B20(45.75,6.5) B21(48.75,6.5) B22(51.75,6.5) B23(54.75,6.5) B24(57.75,6.5) B25(60.75,6.5) B26(63.75,6.5)
  round 3.3 hole 3.3 unplated: CH(38.5,0) LH(0,0) RH(71,0)
  silkscreen extent -3.5,-3.5 74.5,17, body extent -3.5,-19.5 74.5,17, height 28.15
TECO-1981568-5_V [mm] "SMD, 5-Leads, Body 8x5.9mm, Pitch 0.65mm"
  rect 0.4x1.35 smd: 1(-1.3,0) 2(-0.65,0) 3(0,0) 4(0.65,0) 5(1.3,0)
  rect 1.6x1.4 smd: 6(-3.2,-0.225) 7(3.2,-0.225)
  rect 1.45x1.3 smd: 8(-3.425,-2.675) 9(3.425,-2.675)
  rect 1.9x1.9 smd: 10(-1.2,-2.675) 11(1.2,-2.675)
  silkscreen extent -4,-5.63 4,1.12, body extent -4,-5.5 4,0.1, height 2.79
TO-277 [mm] "DFN, 3-Leads, Body 4.44x5.91mm, Pitch 3.68mm, IPC Medium Density, FSV20100V"
  rect 1.3x1.45 smd: 1(-2.794,1.016) 2(-2.794,-1.016)
  rect 4.9x4.15 smd: 3(0.913,0)
  silkscreen extent -3.13,2.67 -3.03,2.76, body extent -3.3,-2.31 3.56,2.32, height 1.2
TQFP64 [mm] "TSQFP, 64-Leads, Body 10.00x10.00mm, Pitch 0.50mm, IPC Medium Density, MKE18F512VLH16"
  rect 1.35x0.3 smd: 1(-5.75,3.75) 2(-5.75,3.25) 3(-5.75,2.75) 4(-5.75,2.25) 5(-5.75,1.75) 6(-5.75,1.25) 7(-5.75,0.75) 8(-5.75,0.25) 9(-5.75,-0.25) 10(-5.75,-0.75) 11(-5.75,-1.25) 12(-5.75,-1.75) 13(-5.75,-2.25) 14(-5.75,-2.75) 15(-5.75,-3.25) 16(-5.75,-3.75) 33(5.75,-3.75) 34(5.75,-3.25) 35(5.75,-2.75) 36(5.75,-2.25) 37(5.75,-1.75) 38(5.75,-1.25) 39(5.75,-0.75) 40(5.75,-0.25) 41(5.75,0.25) 42(5.75,0.75) 43(5.75,1.25) 44(5.75,1.75) 45(5.75,2.25) 46(5.75,2.75) 47(5.75,3.25) 48(5.75,3.75)
  rect 0.3x1.35 smd: 17(-3.75,-5.75) 18(-3.25,-5.75) 19(-2.75,-5.75) 20(-2.25,-5.75) 21(-1.75,-5.75) 22(-1.25,-5.75) 23(-0.75,-5.75) 24(-0.25,-5.75) 25(0.25,-5.75) 26(0.75,-5.75) 27(1.25,-5.75) 28(1.75,-5.75) 29(2.25,-5.75) 30(2.75,-5.75) 31(3.25,-5.75) 32(3.75,-5.75) 49(3.75,5.75) 50(3.25,5.75) 51(2.75,5.75) 52(2.25,5.75) 53(1.75,5.75) 54(1.25,5.75) 55(0.75,5.75) 56(0.25,5.75) 57(-0.25,5.75) 58(-0.75,5.75) 59(-1.25,5.75) 60(-1.75,5.75) 61(-2.25,5.75) 62(-2.75,5.75) 63(-3.25,5.75) 64(-3.75,5.75)
  silkscreen extent -5.87,-4.67 4.67,4.68, body extent -5,-5 5,5, height 1.6
XG8V-0331 [mm] "3 pin header"
  round 1.4 hole 0.8: 1(0,0) 2(2.54,0) 3(5.08,0)

## Part data
bms_ok bspd_ok dschrg fan_en imd_ok mc_en prchrg redun_1 redun_2 rtds rx_g rx_mc ts_live ts_rdy ts_rdy_sen tx_g tx_mc: library part 5, Manufacturer_id=1, MfrPartNo=RCU-0C, Package=0603, ComponentLink1Description=Datasheet, ComponentLink1URL=https://www.te.com/commerce/DocumentDelivery/DDEController?Action=srchrtrv&DocNm=1773266&DocType=DS&DocLang=English, Drawer_id=1, idTable=5, Link=https://www.digikey.com/product-detail/en/te-connectivity-amp-connectors/RCU-0C/A106145CT-ND/3477802, Name=RCU-0C_Test_Point
BSPD_OK FTDI_G LATCH_RELAY T2: library part 2, Manufacturer_id=1, Drawer_id=1
  BSPD_OK FTDI_G: Brightness=35mcd, Id=20mA, idLED=2, Name=LED_0805_GREEN, Vf=2V
  LATCH_RELAY: idRelay=2, Name="Relay JW2SN-DC12"
  T2: Id=0.4A, idFETs=2, Link=https://www.mouser.com/ProductDetail/STMicroelectronics/STN1HNK60?qs=sGAEpiMZZMshyDBzk1%2fWi4oKp8O9xu5UHBm4zQPzbqo%3d, MfrPartNo=STN1HNK60, Name=STN1HNK60_NMOSFET, Rds_On=8Ohms, Vgs(Max)=3.7V, Vgs(typ)=3V
C1_G C1_MC: library part 943, Dielectric=Ceramic, Manufacturer_id=1, Package="CAP 0603/1608", Voltage_Rating=50V, Created_By="Nick Mah", Created_Date=10/20/2018, Drawer_id=1, idCapacitor=943, Name="Cap_0.10uf_50V_CAP 0603/1608"
C2_G C2_MC: library part 929, Dielectric=Ceramic, Manufacturer_id=1, Package="CAP 0603/1608", Voltage_Rating=50V, Created_By="Nick Mah", Created_Date=10/20/2018, Drawer_id=1, idCapacitor=929, Name="Cap_4700pf_50V_CAP 0603/1608"
C3: library part 1065, Dielectric=Ceramic, Manufacturer_id=1, Package="CAP 0805/2012", Voltage_Rating=50V, Created_By="Nick Mah", Created_Date=10/20/2018, Drawer_id=1, idCapacitor=1065, Name="Cap_0.22uf_50V_CAP 0805/2012"
C4: library part 1063, Dielectric=Ceramic, Manufacturer_id=1, Package="CAP 0805/2012", Voltage_Rating=50V, Created_By="Nick Mah", Created_Date=10/20/2018, Drawer_id=1, idCapacitor=1063, Name="Cap_0.10uf_50V_CAP 0805/2012"
C5: library part 223, Dielectric=Ceramic, Manufacturer_id=1, Package="CAP 0603/1608", Voltage_Rating=16V, Created_By="Nick Mah", Created_Date=10/20/2018, Drawer_id=1, idCapacitor=223, Name="Cap_0.10uf_16V_CAP 0603/1608"
C6 C7 C9 C10 C11: library part 583, Dielectric=Ceramic, Manufacturer_id=1, Package="CAP 0603/1608", Voltage_Rating=25V, Created_By="Nick Mah", Created_Date=10/20/2018, Drawer_id=1, idCapacitor=583, Name="Cap_0.10uf_25V_CAP 0603/1608"
C8: library part 529, Dielectric=Ceramic, Manufacturer_id=1, Package="CAP 0603/1608", Voltage_Rating=25V, Created_By="Nick Mah", Created_Date=10/20/2018, Drawer_id=1, idCapacitor=529, Name="Cap_100pf_25V_CAP 0603/1608"
C12 C13 C14 C15: library part 343, Dielectric=Ceramic, Manufacturer_id=1, Package="CAP 0805/2012", Voltage_Rating=16V, Created_By="Nick Mah", Created_Date=10/20/2018, Drawer_id=1, idCapacitor=343, Name="Cap_0.10uf_16V_CAP 0805/2012"
D1 D2 D3 D4 D5 LDO_D: library part 9, idDiode=9
D1_G D1_MC: library part 7, "ESD Protection Diode", Manufacturer_id=1, Package=SOT-23, Power=350W, Supplier1PartNo=NUP1105LT1GOSCT-ND, ComponentLink1URL=https://www.digikey.com/product-detail/en/on-semiconductor/NUP1105LT1G/NUP1105LT1GOSCT-ND/2122067, Drawer_id=1, Ic=8A, idDiode=7, Link=https://www.digikey.com/product-detail/en/on-semiconductor/NUP1105LT1G/NUP1105LT1GOSCT-ND/2122067, MfrPartNo=NUP1105LT1G, Name=SOT-23_350W_Zener, Num_Circuits=1, Supplier1=Digikey, Type=Zener
D6: library part 10, "Zener Diode 14V 500mW �}5% Surface Mount SOD-123", Manufacturer_id=8, Package=SOD-123, Power=500mW, Supplier1PartNo=DDZ9701-7DICT-ND, ComponentLink1Description=Datasheet, ComponentLink1URL=https://www.diodes.com/assets/Datasheets/ds30410.pdf, Drawer_id=1, idDiode=10, Link=https://www.digikey.com/product-detail/en/diodes-incorporated/DDZ9701-7/DDZ9701-7DICT-ND/3877402, MfrPartNo=DDZ9701-7, Name=DDZ9701, Num_Circuits=1, Supplier1=Digi-Key, Type=Zener
D7: library part 11, Manufacturer_id=1, MfrPartNo=FSV20100V, Package=TO-277, Supplier1PartNo=FSV20100VCT-ND, ComponentLink1Description=Datasheet, ComponentLink1URL=https://www.fairchildsemi.com/datasheets/FS/FSV20100V.pdf, Drawer_id=1, idDiode=11, Link=https://www.digikey.com/product-detail/en/on-semiconductor/FSV20100V/FSV20100VCT-ND/5306682, Name=FSV20100V, Type=Schottky
FLASH: library part 4, "2 row connector", Manufacturer_id=1, MfrPartNo=5103309-1, Voltage_Rating=None, ComponentLink1Description=Datasheet, Created_By=Aiku, Drawer_id=1, idConn=4, Link=https://www.digikey.com/product-detail/en/5103309-1/A33160-ND/1114898?utm_campaign=buynow&WT.z_cid=ref_octopart_dkc_buynow&utm_medium=aggregator&curr=usd&site=us&utm_source=octopart, Name=CONN_TE_2X5POS, Num_Contacts=10, Num_Rows=2, Pitch=2.54mm
FRONT FTDI_R MCU REAR: library part 1, Drawer_id=1, Manufacturer_id=1
  FRONT REAR: ComponentLink1Description=Datasheet, idTable=1, Link=https://www.digikey.com/product-detail/en/precision-electronics-corporation/RV6LAYSA502A/RV6L502C-ND/222820, Name=RV6LAYSA502A_rotary_pot
  FTDI_R: idLED=1, Name=LED_0805_RED, Vf=0.7V
  MCU: idMCU=1, Name="MKE18F512VLH16 MCU"
FTDI: library part 3, Manufacturer_id=1, Created_By=Kyle, Drawer_id=1, idIC_Interface=3, Link=https://www.digikey.com/product-detail/en/ftdi-future-technology-devices-international-ltd/FT232RL-REEL/768-1007-1-ND/1836402, MfrPartNo=FT232RL, Name="USB FTDI", Protocol=UART, Vin(Max)=5.25, Vin(Min)=3.3
J1: library part 5, "USB Micro Type B", Manufacturer_id=1, MfrPartNo=1981568-1, ComponentLink1Description=Datasheet, Created_By=Aiku, Created_Date=10/20/2018, Drawer_id=1, idConn=5, Link=https://www.mouser.com/ProductDetail/TE-Connectivity-AMP/1981568-1?qs=sGAEpiMZZMulM8LPOQ%252bykzEIUPbUCiSfqsfxH3Oq%252bYo%3d, Name="TE USB Micro", Num_Contacts=5, Supplier1=TE
LDO: library part 6, Current_Rating=2A, Dropout_Voltage=0.7V, Manufacturer_id=1, Drawer_id=1, idPMIC_Lin=6, Link=https://www.mouser.com/ProductDetail/ROHM-Semiconductor/BA50DD0WHFP-TR?qs=4kLU8WoGk0sFpKnESpdNFg%3D%3D, Name="BA50DD0WHFP-TR Linear Voltage Regulator 5", Vin(Max)=33V, Vin(Min)=3V, Vout(Max)=5V
MC_PWR: library part 4, Manufacturer_id=1, MfrPartNo=M2011SS1W01_UC, Voltage_Rating="125 V", ComponentLink1Description=Datasheet, ComponentLink1URL=https://www.nkkswitches.com/pdf/MtogglesBushing.pdf, Drawer_id=1, idTable=4, Link=https://www.digikey.com/product-detail/en/nkk-switches/M2011SS1W01-UC/360-3289-ND/2105194, Name=M2011SS1W01_UC_SPST_Switch
PTC: library part 4, "Fuse", Manufacturer_id=1, MfrPartNo=2920L200, Created_By="Eunice Bernardo", Created_Date=10/27/2018, Drawer_id=1, I-hold=F?, I_hold=2A, I_max=40A, I_trip=4A, idFuse=4, LatestRevisionDate=17-Jul-2002, LatestRevisionNote="Re-released for DXP Platform.", Link=https://www.digikey.com/product-detail/en/littelfuse-inc/2920L200-24DR/F2872TR-ND/1211346, Name="PTC Poly Fuse Resettable", PackageDescription="Thru-Hole; 2 Leads", PackageReference=PIN-W2/E2.8, Published=8-Jun-2000, Publisher="Altium Limited"
R1_G R1_MC: library part 2293, Manufacturer_id=1, Package=0603, Power=1/10W, Tolerance=10%, ComponentLink1Description=Datasheet, Created_By="Nick Mah", Created_Date=2018-10-20, Drawer_id=1, idResistor=2293, Name=Res_100_0603_1/10W_10%, Supplier 1=Digi-Key
R2_G R2_MC R3_G R3_MC: library part 1340, Manufacturer_id=1, Package=0603, Power=1/10W, Tolerance=5%, ComponentLink1Description=Datasheet, Created_By="Nick Mah", Created_Date=2018-10-20, Drawer_id=1, idResistor=1340, Name=Res_62_0603_1/10W_5%, Supplier 1=Digi-Key
R4 R8: library part 1808, Manufacturer_id=1, Package=0805, Power=1/4W, Tolerance=5%, ComponentLink1Description=Datasheet, Created_By="Nick Mah", Created_Date=2018-10-20, Drawer_id=1, idResistor=1808, Name=Res_2.0k_0805_1/4W_5%, Supplier 1=Digi-Key
R5 R6: library part 2028, Manufacturer_id=1, Package=0805, Power=1/2W, Tolerance=5%, ComponentLink1Description=Datasheet, Created_By="Nick Mah", Created_Date=2018-10-20, Drawer_id=1, idResistor=2028, Name=Res_3.0k_0805_1/2W_5%, Supplier 1=Digi-Key
R7 R9: library part 1831, Manufacturer_id=1, Package=0805, Power=1/4W, Tolerance=5%, ComponentLink1Description=Datasheet, Created_By="Nick Mah", Created_Date=2018-10-20, Drawer_id=1, idResistor=1831, Name=Res_18k_0805_1/4W_5%, Supplier 1=Digi-Key
R10: library part 706, Manufacturer_id=1, Package=0805, Power=1/4W, Tolerance=1%, ComponentLink1Description=Datasheet, Created_By="Nick Mah", Created_Date=2018-10-20, Drawer_id=1, idResistor=706, Name=Res_240_0805_1/4W_1%, Supplier 1=Digi-Key
R11: library part 761, Manufacturer_id=1, Package=0805, Power=1/4W, Tolerance=1%, ComponentLink1Description=Datasheet, Created_By="Nick Mah", Created_Date=2018-10-20, Drawer_id=1, idResistor=761, Name=Res_47k_0805_1/4W_1%, Supplier 1=Digi-Key
R12 R15 R18 R31: library part 545, Manufacturer_id=1, Package=0805, Power=1/10W, Tolerance=1%, ComponentLink1Description=Datasheet, Created_By="Nick Mah", Created_Date=2018-10-20, Drawer_id=1, idResistor=545, Name=Res_47k_0805_1/10W_1%, Supplier 1=Digi-Key
R13 R14 R16 R17 R19 R20 R21 R22 R23 R24: library part 1625, Manufacturer_id=1, Package=0805, Power=1/10W, Tolerance=5%, ComponentLink1Description=Datasheet, Created_By="Nick Mah", Created_Date=2018-10-20, Drawer_id=1, idResistor=1625, Name=Res_47k_0805_1/10W_5%, Supplier 1=Digi-Key
R25 R28: library part 1841, Manufacturer_id=1, Package=0805, Power=1/4W, Tolerance=5%, ComponentLink1Description=Datasheet, Created_By="Nick Mah", Created_Date=2018-10-20, Drawer_id=1, idResistor=1841, Name=Res_47k_0805_1/4W_5%, Supplier 1=Digi-Key
R29: library part 2541, Manufacturer_id=1, Package=0805, Power=1/4W, Tolerance=10%, ComponentLink1Description=Datasheet, Created_By="Nick Mah", Created_Date=2018-10-20, Drawer_id=1, idResistor=2541, Name=Res_47k_0805_1/4W_10%, Supplier 1=Digi-Key
R30: library part 313, Manufacturer_id=1, Package=0603, Power=1/10W, Tolerance=1%, ComponentLink1Description=Datasheet, Created_By="Nick Mah", Created_Date=2018-10-20, Drawer_id=1, idResistor=313, Name=Res_10k_0603_1/10W_1%, Supplier 1=Digi-Key
R32: library part 497, Manufacturer_id=1, Package=0805, Power=1/10W, Tolerance=1%, ComponentLink1Description=Datasheet, Created_By="Nick Mah", Created_Date=2018-10-20, Drawer_id=1, idResistor=497, Name=Res_470_0805_1/10W_1%, Supplier 1=Digi-Key
R33 R34 R35 R36: library part 721, Manufacturer_id=1, Package=0805, Power=1/4W, Tolerance=1%, ComponentLink1Description=Datasheet, Created_By="Nick Mah", Created_Date=2018-10-20, Drawer_id=1, idResistor=721, Name=Res_1.0k_0805_1/4W_1%, Supplier 1=Digi-Key
RVP_LED: library part 2, Manufacturer_id=1, Package=0805, Brightness=7mcd, Drawer_id=1, Id=20mA, idLED=2, Link=https://www.digikey.com/product-detail/en/visual-communications-company-vcc/CMD17-21VGD-TR8/L62505CT-ND/254936, Name=CMD17_0805_GREEN, Vf=2.1V
T1: library part 3, "N-Channel 25V 100A (Tc) 106W (Tc) Surface Mount LFPAK56, Power-SO8", Manufacturer_id=6, MfrPartNo=PSMN2R2-25YLC,115, Package=LFPAK-SO8, Supplier1PartNo=1727-5299-1-ND, ComponentLink1Description=Datasheet, ComponentLink1URL=https://assets.nexperia.com/documents/data-sheet/PSMN2R2-25YLC.pdf, Created_By=Nick, Drawer_id=1, Id=100A, idFETs=3, Link=https://www.digikey.com/product-detail/en/nexperia-usa-inc/PSMN2R2-25YLC115/1727-5299-1-ND/2674299, Name=PSMN2R2, Num_Circuits=1, Rds_On=2.5mOhm, Supplier1=Digi-Key, Vdss=25V, Vgs(Max)=20V, Vgs(typ)=10V
U1_G U1_MC: library part 5, Manufacturer_id=1, MfrPartNo=MCP2561, Package=SOIC-8, Created_By="Angel Delgado", Data_Rate=1Mbps, Drawer_id=1, idIC_Interface=5, Link=https://www.digikey.com/product-detail/en/microchip-technology/MCP2561T-E-SN/MCP2561T-E-SNCT-ND/5148846, Name="CAN Transceiver", Num_Circuits=1, Protocol=CAN, Type=Transceiver, Vin(Max)=5.5V, Vin(Min)=4.5V
U2 U4 U6 U8: library part 7, Manufacturer_id=1, Drawer_id=1, idIC_Misc=7, Name="LT1018 Dual Comparator"
U3: library part 15, idIC_Misc=15
U5: library part 14, Manufacturer_id=1, Drawer_id=1, idIC_Misc=14, Name=SN74LVC1G32_2_input_OR_GATE
U7: library part 12, Manufacturer_id=1, Drawer_id=1, idIC_Misc=12, Name="SN74LVC2G132DCUR 2channel NAND Gate"
U9 U10 U11 U12: library part 6, "High Side Driver", Manufacturer_id=1, Drawer_id=1, idIC_Misc=6, Name="BTS716G High Side Driver"
U13: library part 6, "High Side Driver", Manufacturer_id=1, MfrPartNo=BTS716GXUMA1, ComponentLink1Description=Datasheet, ComponentLink1URL=https://www.infineon.com/dgdl/Infineon-BTS716G-DS-v01_00-EN.pdf?fileId=5546d4625a888733015aa3be86601004, Drawer_id=1, idIC_Misc=6, Link=https://www.digikey.com/product-detail/en/infineon-technologies/BTS716GXUMA1/BTS716GXUMA1CT-ND/520067, Name="BTS716G High Side Driver"
X1: library part 3, "90 Degree", Manufacturer_id=1, MfrPartNo=3-6437285-2, ComponentLink1Description=Datasheet, Drawer_id=1, idConn=3, Link=https://www.te.com/usa-en/product-3-6437285-2.html, Name="AMP Superseal 60POS 90Deg", Num_Contacts=60, Num_Rows=4, Pitch="3 mm"
X2: library part 8, "3 pin header", Manufacturer_id=1, ComponentLink1Description=Datasheet, Drawer_id=1, idConn=8, Link=https://www.digikey.com/products/en/connectors-interconnects/rectangular-connectors-headers-male-pins/314?k=jumper&k=&pkeyword=jumper&pv88=5&sf=0&FV=ffe0013a&quantity=&ColumnSort=0&page=1&pageSize=25, Name=XG8V-0331_3pin_header, Num_Contacts=3, Pitch="2.54 mm"
Y1 Y2 Y3 Y4 Y5: library part 3, Coil_Voltage=12V, Manufacturer_id=1, Drawer_id=1, idRelay=3, LatestRevisionDate=17-Jul-2002, LatestRevisionNote="Re-released for DXP Platform.", Name=ACTP112, PackageReference=MODULE5B, Published=8-Jun-2000, Publisher="Altium Limited"

## Free pads (board coordinates)
  round 5 hole 3.3: 4(203.454,43.942) 4(203.454,165.862) 4(300.99,43.942) 4(300.99,165.862)

## Via types
v1: diameter 0.762, hole 0.381, Top Layer to Bottom Layer, 205 vias
v2: diameter 2.4, hole 1.2, Top Layer to Bottom Layer, 9 vias

## Nets (pads, with @x,y where several pads share a name; then routed paths per layer and width w, separated by ;. In a path a pad name is that pad's centre, name@x,y a point inside that pad or via, vN(x,y) a via of type N, cw(c..) or ccw(c..) an arc to the next point about the centre after c; other vN are vias at no path point)
0.5V: C12.2 R7.1 R8.2 U2.8 U4.8 | length 30
  Top Layer w0.254: R7.1@205.562,153.811 R8.2@205.562,149.084 210.237,149.084 C12.2@210.312,149.009 211.493,149.009 212.09,149.606 212.09,151.442 213.233,152.585 U2.8@217.17,152.585 217.17,150.749 217.678,150.241 223.52,150.241 224.409,151.13 U4.8@224.409,152.585
1: MCU.26 R14.2 U8.8 X1.B1 | length 90.5
  Top Layer w0.254: U8.8@231.59,148.844 232.791,148.844 234.365,150.418 234.365,152.958 235.458,154.051 247.65,154.051 v1(251.968,149.733) ; v1(258.445,125.73) 258.445,125.721 260.096,124.07 260.096,121.539 266.954,114.681 267.544,114.681 267.696,114.833 269.596,114.833 v1(269.621,114.808)
  Bottom Layer w0.254: v1(251.968,149.733) 253.238,148.463 253.238,142.875 249.809,139.446 249.809,134.366 v1(258.445,125.73) ; v1(269.621,114.808) 269.621,114.554 269.941,114.234 MCU.26@271.688,114.234 272.603,114.234 279.795,121.426 R14.2@280.162,121.426 280.178,121.41 X1.B1@284.139,121.41
2: MCU.27 R17.2 U8.1 X1.B8 | length 100.4
  Top Layer w0.254: U8.1@237.04,148.844 237.04,148.405 237.49,147.955 v1(238.887,147.955) ; v1(258.445,124.41) 258.445,124.088 259.512,123.021 259.512,121.548 266.887,114.173 v1(267.97,114.173)
  Bottom Layer w0.254: v1(238.887,147.955) 241.173,147.955 242.059,147.069 242.059,138.173 232.883,128.997 232.883,128.432 233.426,127.889 234.315,127.889 240.115,133.689 249.166,133.689 v1(258.445,124.41) ; v1(267.97,114.173) 269.113,114.173 269.552,113.734 MCU.27@271.688,113.734 272.796,113.734 277.868,118.806 R17.2@286.639,118.806 X1.B8@286.639,122.91
3: MCU.31 R20.2 X1.A34 | length 32.4
  Top Layer w0.254: v1(270.129,111.734) 272.075,111.734 278.018,105.791 282.067,105.791 282.448,105.41 284.724,105.41 285.26,104.875 285.26,104.839 286.212,103.886 290.066,103.886 291.211,105.031 291.211,105.982 X1.A34@292.139,106.91
  Bottom Layer w0.254: v1(270.129,111.734) MCU.31@271.688,111.734 ; X1.A34@292.139,106.91 292.146,106.903 292.31,106.903 293.751,108.344 R20.2@293.751,109.869
4: MCU.30 R22.2 X1.A25 | length 27.3
  Bottom Layer w0.254: MCU.30@271.688,112.234 272.477,112.234 275.689,109.022 275.689,109.012 276.987,107.714 276.987,106.426 277.505,105.908 277.515,105.908 277.901,105.522 277.901,105.512 278.003,105.41 284.724,105.41 285.26,104.875 285.26,104.839 286.068,104.031 287.21,104.031 288.018,104.839 288.018,104.875 288.554,105.41 X1.A25@289.639,105.41 289.433,105.616 R22.2@289.433,109.869
4.5V: C13.2 R4.1 R9.2 U2.3 U4.3 | length 41.1
  Top Layer w0.254: C13.2@210.337,137.452 210.262,137.527 R9.2@205.588,137.527 R4.1@205.588,142.254 211.215,142.254 211.215,144.663 215.561,149.009 218.656,149.009 219.71,147.955 U2.3@219.71,147.135 v1@219.71,145.845 ; v1(226.949,145.161) 226.949,146.881 227.076,147.008 U4.3@226.949,147.135
  Bottom Layer w0.254: v1(219.71,145.669) 221.234,144.145 226.441,144.145 226.949,144.653 v1(226.949,145.161)
5: MCU.29 R13.1 U4.1 U4.4 U6.3 X1.A9 | length 108.3
  Top Layer w0.254: v1(216.027,133.477) 215.773,133.731 215.773,138.684 216.154,139.065 U6.3@217.239,139.065 218.567,139.065 219.661,140.159 219.661,142.826 222.885,146.05 222.885,146.685 223.335,147.135 U4.1@224.409,147.135 224.917,147.643 224.917,148.717 227.076,148.717 227.584,148.209 227.584,147.828 U4.4@228.219,147.135 ; v1(258.445,121.539) 258.445,121.285 266.7,113.03 267.301,113.03 267.682,112.649 v1(267.843,112.649)
  Bottom Layer w0.254: v1(216.027,133.477) 222.593,126.911 235.115,126.911 239.268,131.064 248.92,131.064 v1(258.445,121.539) ; v1@268.097,112.522 268.309,112.734 268.475,112.734 268.585,112.624 269.133,112.624 269.243,112.734 MCU.29@271.688,112.734 274.87,112.734 280.275,107.329 R13.1@280.275,106.934 280.299,106.91 X1.A9@284.139,106.91
5V: C1_G.2 C1_MC.2 C4.2 C5.2 C6.2 C7.2 C8.2 C10.2 FLASH.1 FTDI.4 FTDI.19 FTDI.20 J1.1 LDO.4 LDO_D.1 MC_PWR.2 MCU.7 MCU.8 MCU.9 MCU.41 R4.2 R5.2 R6.2 R7.2 R25.2 R30.2 R35.2 R36.2 U1_G.3 U1_MC.3 U2.6 U3.12 U3.14 U4.6 U5.5 U6.6 U7.8 U8.6 U9.1 U9.10 U9.11 U9.12 U9.15 U9.16 U9.19 U9.20 U13.1 U13.10 U13.11 U13.12 U13.15 U13.16 U13.19 U13.20 X1.B19 X2.2 | length 731.6
  Top Layer w0.254: X2.2@246.888,149.479 246.888,148.336 247.12,148.104 U5.5@247.12,147
  Top Layer w0.457: 269.243,132.204 273.871,132.204 ; 273.876,132.21 274.51,132.21
  Top Layer w0.513: R36.2@202.62,100.725 202.62,99.259 203.454,98.425 v1(204.271,98.425) ; R35.2@214.036,95.631 v1(215.828,95.631) ; MC_PWR.2@216.408,75.057 220.091,75.057 222.504,77.47 222.504,84.455 229.616,91.567 229.616,114.3 231.267,115.951 236.728,115.951 237.109,115.57 237.109,114.541 v1(236.728,114.16) 235.295,114.16 235.27,114.185 233.894,114.185 233.869,114.16 233.54,114.16 232.283,112.903 232.283,93.726 235.077,90.932 239.649,90.932 240.284,91.567 R25.2@242.203,91.567 ; v1@233.934,128.726 229.691,128.726 229.056,128.091 225.298,128.091 R5.2@224.663,128.726 224.663,130.937 220.98,134.62 220.98,138.43 221.615,139.065 U6.6@222.689,139.065 224.917,139.065 226.006,140.154 U3.14@229.489,140.154 229.489,139.319 230.362,139.319 230.38,139.301 231.138,139.301 232.004,140.166 232.004,143.589 230.044,143.59 229.235,144.399 229.235,147.701 228.727,148.209 228.727,150.114 229.238,150.625 229.873,150.625 230.632,151.384 U8.6@231.59,151.384 232.664,151.384 233.172,151.892 233.172,153.035 232.664,153.543 231.013,153.543 230.019,152.549 230.019,151.765 229.638,151.384 227.33,151.384 226.949,151.765 U4.6@226.949,152.585 226.949,153.684 226.201,154.432 223.774,154.432 222.631,153.289 222.631,151.511 222.123,151.003 220.091,151.003 219.71,151.384 U2.6@219.71,152.585 219.71,154.178 218.327,155.561 R7.2@205.562,155.561 204.329,155.561 203.581,154.813 203.581,146.417 204.329,145.669 207.076,145.669 207.518,145.227 207.518,144.446 207.076,144.004 R4.2@205.588,144.004 204.202,144.004 203.581,143.383 203.581,132.334 205.105,130.81 207.01,130.81 207.645,130.175 207.645,129.361 207.096,128.812 R6.2@205.537,128.812 203.166,128.812 202.057,129.921 202.057,155.231 204.56,157.734 246.126,157.734 255.651,148.209 266.192,148.209 271.688,153.705 v1(271.688,153.797) 271.688,155.864 273.48,157.656 LDO_D.1@277.114,157.656 277.114,156.464 279.946,153.632 C4.2@280.797,153.632 282.029,153.632 283.741,155.344 LDO.4@285.34,155.344 285.727,155.344 286.512,154.559 286.512,141.605 v1@286.131,141.224 ; C1_G.2@254.127,110.744 U1_G.3@254.127,106.992 v1(254.127,105.156) 253.873,104.902 252.857,104.902 252.12,105.639 252.12,112.751 249.555,115.316 v1(246.888,115.316) 244.729,117.475 244.729,121.158 246.166,122.595 C5.2@247.269,122.595 247.309,122.555 FLASH.1@250.145,122.555 250.145,122.764 251.318,123.937 R30.2@251.318,124.968 251.318,125.588 257.934,132.204 257.909,132.23 257.909,135.608 259.753,137.452 v1(261.112,137.452) ; v1(261.874,97.536) 263.525,95.885 v1(267.462,95.885) ; v1(265.684,122.174) 265.136,122.722 C7.2@265.136,123.571 265.136,124.674 266.192,125.73 v1(266.192,126.619) 266.192,127.127 266.475,127.41 267.468,127.41 267.716,127.162 U9.11@267.716,125.651 267.716,124.206 267.97,123.952 268.732,123.952 268.986,124.206 U9.12@268.986,125.651 268.986,126.4 269.586,127 272.288,127 272.796,126.492 U9.15@272.796,125.651 272.796,124.311 273.155,123.952 273.763,123.952 274.066,124.255 U9.16@274.066,125.651 274.066,126.554 274.574,127.062 277.306,127.062 277.876,126.492 U9.19@277.876,125.651 277.876,124.333 278.257,123.952 278.892,123.952 279.146,124.206 U9.20@279.146,125.651 v1(279.146,127.889) ; v1@266.981,105.791 v1(266.954,105.764) 270.255,105.764 C8.2@270.303,105.812 ; U9.10@267.716,135.001 267.716,133.731 269.243,132.204 ; 273.871,132.204 273.876,132.21 ; 274.51,132.21 274.512,132.207 277.876,132.207 279.146,133.477 U9.1@279.146,135.001 279.146,136.779 v1(280.289,137.922)
  Bottom Layer w0.356: C6.2@265.688,105.704 MCU.41@265.688,109.234
  Bottom Layer w0.4: C6.2@265.684,105.704 265.688,105.704 266.894,105.704 v1(266.954,105.764) ; v1(265.684,122.174) 265.684,120.738 MCU.8@265.688,120.734
  Bottom Layer w0.513: J1.1@201.477,102.84 203.225,102.84 204.144,103.759 206.557,103.759 207.95,105.152 FTDI.19@207.95,107.821 207.95,109.063 208.107,109.22 208.462,109.22 208.626,109.056 FTDI.20@208.626,107.821 208.626,104.812 206.754,102.94 204.341,102.94 203.636,102.235 203.636,99.06 v1(204.271,98.425) ; v1@204.398,98.298 204.993,97.703 C10.2@209.986,97.703 209.986,98.552 210.24,98.806 211.51,98.806 212.006,99.302 FTDI.4@212.006,100.571 212.006,101.969 212.78,102.743 214.05,102.743 215.828,100.965 v1(215.828,95.631) 215.828,89.209 212.598,85.979 212.598,76.284 213.825,75.057 MC_PWR.2@216.408,75.057 MC_PWR.2@216.662,75.057 ; v1(234.061,128.778) 234.061,129.032 246.888,141.859 X2.2@246.888,149.479 ; v1(236.728,114.16) 245.732,114.16 v1(246.888,115.316) ; v1(254.127,105.156) 254.127,104.648 257.556,101.219 257.556,99.949 258.064,99.441 258.953,99.441 259.207,99.695 U13.11@259.207,101.449 259.207,102.362 259.461,102.616 260.271,102.616 260.477,102.41 U13.12@260.477,101.449 260.477,100.172 261.874,98.775 v1(261.874,97.536) 261.747,97.409 259.715,97.409 259.207,96.901 U13.10@259.207,92.099 U13.10@259.207,91.735 ; MCU.8@265.688,120.734 MCU.9@266.08,120.734 ; v1(266.192,126.619) 267.803,126.619 C1_MC.2@268.311,127.127 268.311,130.077 U1_MC.3@268.351,130.117 ; v1(266.954,105.764) 266.954,103.378 265.557,101.981 U13.16@265.557,101.449 U13.15@264.287,101.449 264.188,101.35 264.188,99.951 264.132,99.895 264.132,99.114 264.153,99.093 264.153,98.813 265.176,97.79 268.732,97.79 269.748,98.806 269.748,101.068 U13.19@269.367,101.449 269.367,102.5 269.61,102.743 270.256,102.743 270.637,102.362 U13.20@270.637,101.449 270.637,97.889 269.776,97.028 267.843,97.028 267.462,96.647 v1(267.462,95.885) 268.478,94.869 269.24,94.869 270.637,93.472 U13.1@270.637,92.099 U13.1@270.637,91.735 ; v1(271.688,153.797) 271.688,144.618 268.802,141.732 265.49,141.732 261.112,137.354 261.112,135.614 264.646,132.08 270.637,132.08 274.828,127.889 v1(279.146,127.889) ; v1(280.289,137.922) 283.464,141.097 v1(285.877,141.097) 289.064,137.91 X1.B19@289.639,137.91
  Bottom Layer w0.523: MCU.7@265.3,120.734 MCU.8@265.688,120.734
6: MCU.28 R16.1 U2.1 U2.4 U6.1 X1.A17 | length 118.5
  Top Layer w0.254: v1(217.17,143.615) 218.081,143.615 218.821,142.875 218.821,141.986 218.44,141.605 U6.1@217.239,141.605 216.281,141.605 215.773,142.113 215.773,146.431 216.281,146.939 216.974,146.939 U2.1@217.17,147.135 217.17,145.157 218.182,144.145 219.964,144.145 220.98,145.161 U2.4@220.98,147.135 ; v1(258.191,123.19) 258.191,122.727 259.105,121.813 259.105,121.38 267.049,113.436 268.707,113.436 v1(268.859,113.284)
  Bottom Layer w0.254: v1(217.17,143.615) 222.863,137.922 222.875,137.933 231.033,137.933 232.156,136.81 232.156,128.397 233.172,127.381 234.696,127.381 239.691,132.376 249.259,132.376 258.191,123.444 v1(258.191,123.19) ; v1@268.859,113.234 MCU.28@271.688,113.234 275.132,113.234 278.497,109.869 R16.1@286.639,109.869 X1.A17@286.639,105.41
7: MCU.32 R23.1 X1.A8 | length 20.9
  Bottom Layer w0.254: MCU.32@271.688,111.234 271.688,105.248 273.304,103.632 273.896,103.632 274.531,104.267 276.479,104.267 278.37,102.376 R23.1@279.795,102.376 281.432,102.376 282.966,103.91 X1.A8@284.139,103.91 X1.A8@284.05,103.999
8: MCU.34 R19.1 X1.A16 | length 22.9
  Bottom Layer w0.254: MCU.34@269.188,109.234 269.188,107.793 269.392,107.589 269.392,107.041 269.188,106.837 269.188,105.97 272.161,102.997 275.209,102.997 R19.1@275.463,103.251 ; R19.1@276.098,103.251 276.733,103.251 278.765,101.219 281.559,101.219 282.75,102.41 X1.A16@286.639,102.41
9: MCU.24 R21.1 X1.A15 | length 40.1
  Top Layer w0.254: v1(266.319,112.353) 266.912,112.353 269.586,109.679 269.586,107.534 269.367,107.315 v1(268.732,107.315)